# EAGLE board base (EAGLE 6.5.0)
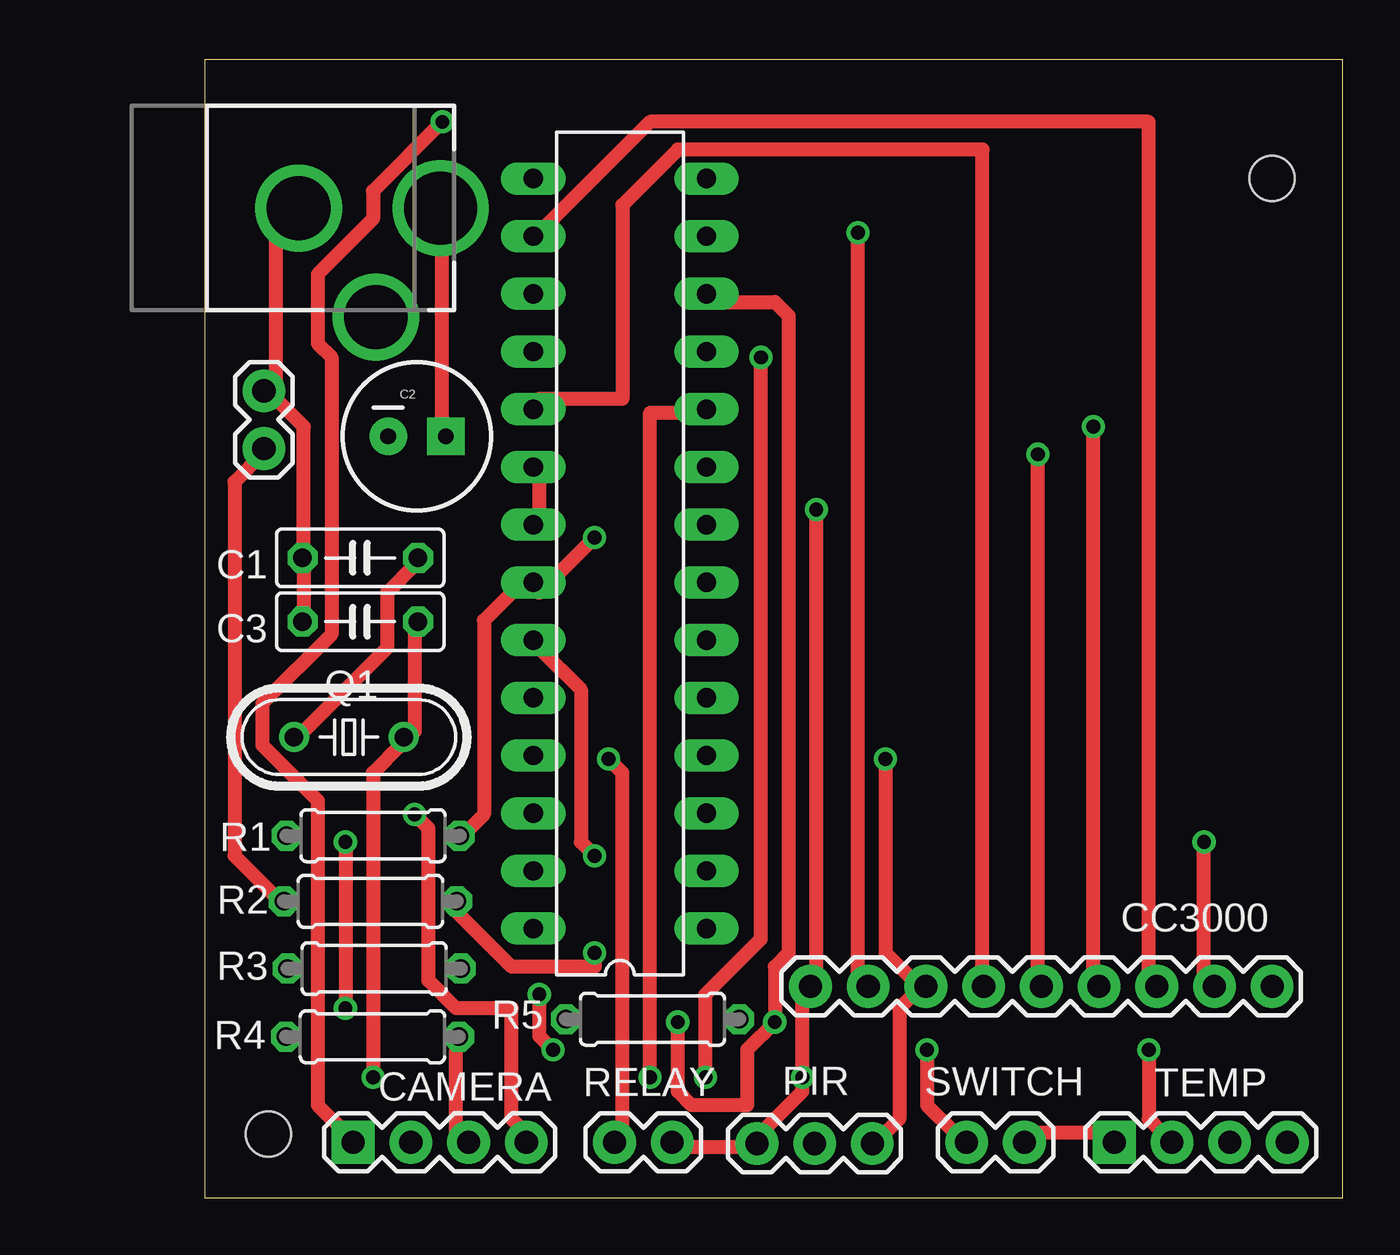
[diagram p0: board, top side]
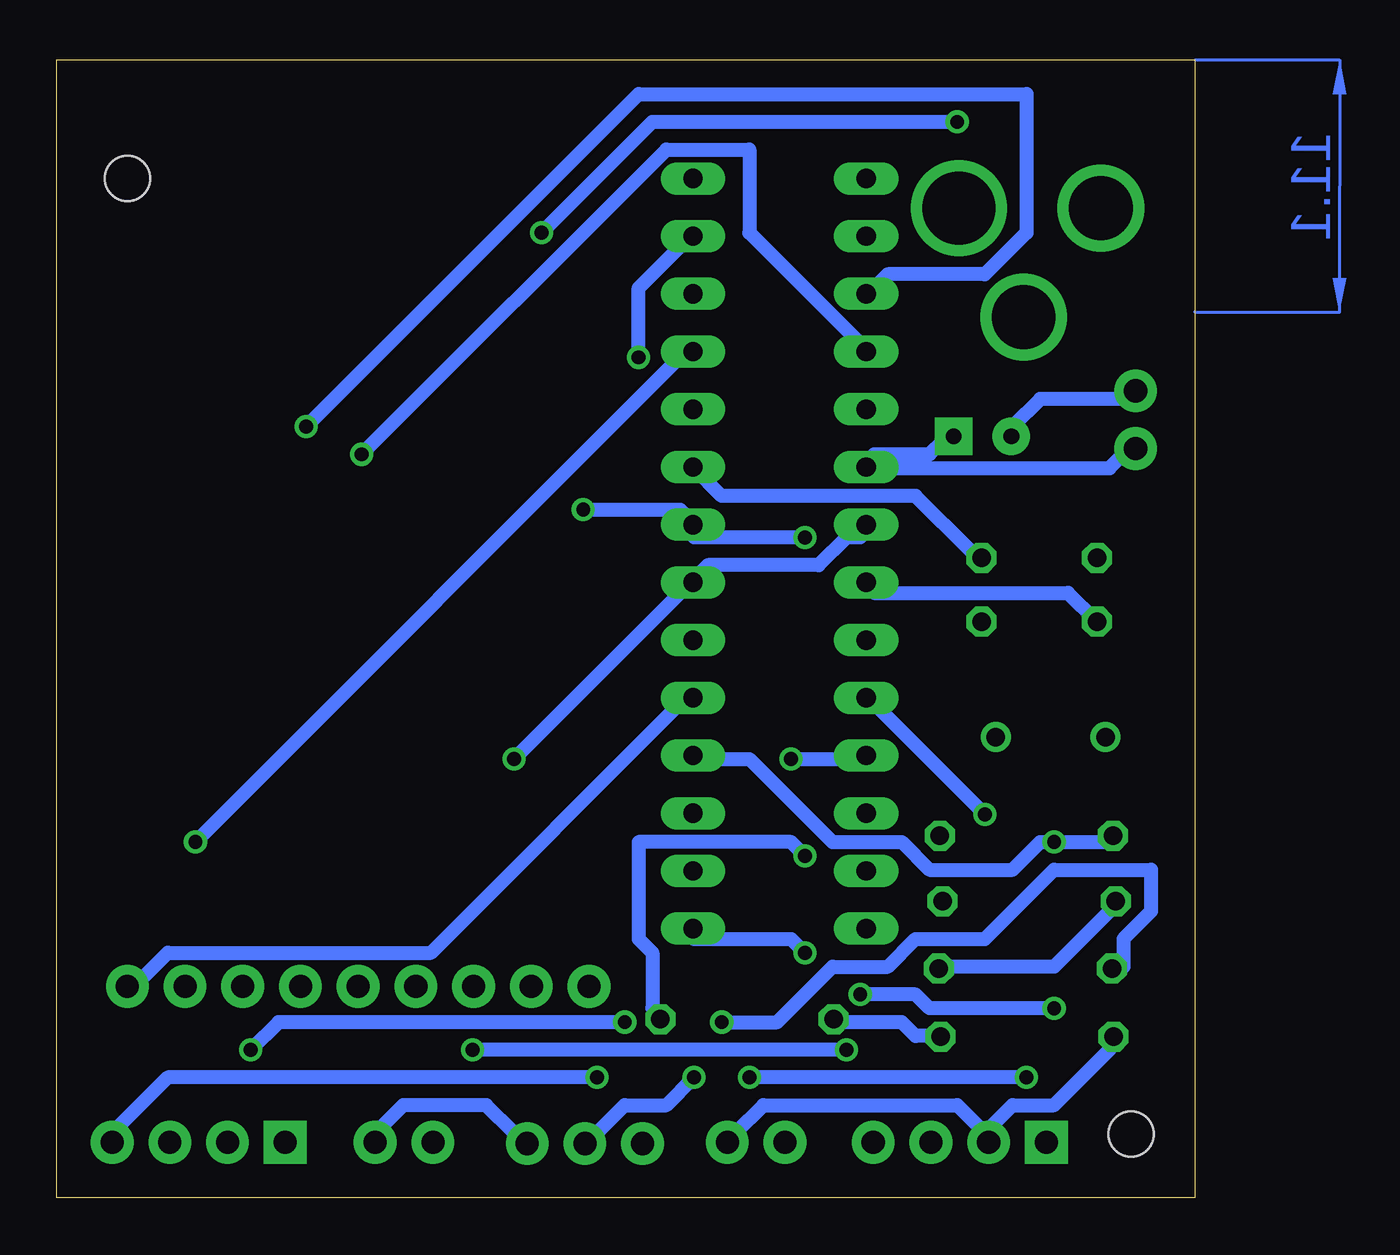
[diagram p1: board, bottom side, seen from below]

Size 50.09 x 50.09 mm. Coordinates in mm from the lower left corner, seen from the top.
Outline: 0,0 50.09,0 50.09,50.09 0,50.09 0,0
Copper layers (1*16): Top 0.035mm / dielectric 1.5mm / Bottom 0.035mm
Design rules "default *": minimum track width 24mil, minimum drill 24mil, track to track 10mil, track to pad 8mil, pad to pad 8mil, via to via 8mil, smd to smd 8mil, copper to edge 40mil, drill to drill 8mil, minimum pad ring 10mil, minimum via ring 8mil, stop-mask expansion 4mil, vias tented up to drill 0mil, thermal gap 10mil
Net classes: 0 default: width 0.152 mm, clearance 0.152 mm; 1 power: width 0.61 mm, drill 0.61 mm, clearance 0.254 mm; 2 gnd: width 0.203 mm, drill 0.559 mm, clearance 0.152 mm; 3 usbvcc: width 0.203 mm, drill 0.61 mm, clearance 0.152 mm; 4 aref: width 0.406 mm, drill 0.61 mm, clearance 0.254 mm
Holes 2 mm at 46.99,44.87 2.81,2.81

## Footprints (pad centres in the part's own frame; a part is rotated, then mirrored left to right if it is on the bottom)
C050-025X075 = drill 0.813 octagon: 1 -2.54,0; 2 2.54,0
CPOL-RADIAL-100UF-25V = drill 0.7 pad 1.651 square: 1 1.27,0 | drill 0.7 pad 1.651: 2 -1.27,0
1X04 = drill 1.016 pad 1.88 square: 1 0,0 | drill 1.016 pad 1.88: 2 2.54,0; 3 5.08,0; 4 7.62,0
1X09 = drill 1.016 pad 1.88: 1 0,0; 2 2.54,0; 3 5.08,0; 4 7.62,0; 5 10.16,0; 6 12.7,0; 7 15.24,0; 8 17.78,0; 9 20.32,0
DCJACK_2MM_PTH = drill 2.8: GND 0,7.35; GNDBREAK 4.8,10.75 | drill 3.2: PWR 0,13.6
1X02 = drill 1.016 pad 1.88: 1 0,0; 2 2.54,0
1X03 = drill 1.016 pad 1.88: 1 0,0; 2 2.54,0; 3 5.08,0
HC49/S = drill 0.813: 1 -2.413,0; 2 2.413,0
0207/7 = drill 0.813 octagon: 1 -3.81,0; 2 3.81,0
DIL28-3 = drill 0.85 pad 1.422 long: 1 -16.51,-3.81; 2 -13.97,-3.81; 3 -11.43,-3.81; 4 -8.89,-3.81; 5 -6.35,-3.81; 6 -3.81,-3.81; 7 -1.27,-3.81; 8 1.27,-3.81; 9 3.81,-3.81; 10 6.35,-3.81; 11 8.89,-3.81; 12 11.43,-3.81; 13 13.97,-3.81; 14 16.51,-3.81; 15 16.51,3.81; 16 13.97,3.81; 17 11.43,3.81; 18 8.89,3.81; 19 6.35,3.81; 20 3.81,3.81; 21 1.27,3.81; 22 -1.27,3.81; 23 -3.81,3.81; 24 -6.35,3.81; 25 -8.89,3.81; 26 -11.43,3.81; 27 -13.97,3.81; 28 -16.51,3.81

## Placement (x,y rotation side)
C1  22p  [C050-025X075]  6.85,28.17 180 top
C2  [CPOL-RADIAL-100UF-25V]  9.35,33.52 0 top
C3  22p  [C050-025X075]  6.85,25.36 180 top
CAMERA  [1X04]  6.54,2.44 0 top
CC3000  M09  [1X09]  46.99,9.31 180 top
CN1  [DCJACK_2MM_PTH]  -3.21,43.56 270 top
JP2  POWER  [1X02]  2.61,32.98 90 top
PIR  PIR  [1X03]  24.31,2.39 0 top
Q1  [HC49/S]  6.35,20.28 0 top
R1  10K  [0207/7]  7.42,15.94 0 top
R2  10K  [0207/7]  7.3,13.05 0 top
R3  10K  [0207/7]  7.46,10.09 0 top
R4  10K  [0207/7]  7.39,7.09 0 top
R5  10K  [0207/7]  19.71,7.86 0 top
RELAY  M02PTH  [1X02]  18.04,2.44 0 top
SWITCH  M02PTH  [1X02]  33.54,2.44 0 top
TEMP  [1X04]  40.04,2.44 0 top
ZU4  ATMEGA328P-PU  [DIL28-3]  18.28,28.36 90 top

## Library data of the parts
C1 C3 R1-R5 = resistor
C2 = SparkFun-Passives
CAMERA CC3000 JP2 PIR RELAY SWITCH TEMP = SparkFun-Connectors
CN1 = adafruit
Q1 = crystal; OC_FARNELL: 1667008; OC_NEWARK: unknown
ZU4 = SmartPrj

## Nets
GND [gnd]: C1.2 C2.2 C3.2 CAMERA.2 CC3000.9 CN1.GND JP2.2 PIR.1 R1.2 R4.1 RELAY.2 TEMP.4 ZU4.8 ZU4.22
GNDBREAK: CN1.GNDBREAK
N$1: CC3000.2 ZU4.11
N$2: CC3000.1 ZU4.5
N$3: R2.2 ZU4.1
N$4: C1.1 Q1.1 ZU4.9
N$5: CC3000.6 ZU4.19
N$6: CC3000.3 ZU4.16
N$7: R1.1 SWITCH.1 ZU4.4
N$8: RELAY.1 ZU4.25
N$9: R3.1 TEMP.2 ZU4.12
N$11: CAMERA.1 CC3000.8
N$12: CAMERA.4 ZU4.24
N$13: CAMERA.3 R4.2 R5.1
N$14: ZU4.6
N$15: R5.2 ZU4.23
N$19: CC3000.5 ZU4.18
N$20: CC3000.4 ZU4.17
N$26: PIR.2 ZU4.13
VCC [usbvcc]: C2.1 CC3000.7 CN1.PWR JP2.1 PIR.3 R2.1 R3.2 SWITCH.2 TEMP.1 ZU4.7 ZU4.20 ZU4.21
XTAL2: C3.1 Q1.2 ZU4.10

## Tracks (layer width: path | path; a pad name or v marks a point on that pad's centre or on a via)
GND  (via drill 0.61)
  Top 0.61: 4.37,43.7 CN1.GND 3.76,43.09 3.15,42.48 3.15,35.78 JP2.2 3.15,35.17 4.37,33.95 4.37,28.46 C1.2 4.37,27.85 4.37,25.41 C3.2 | R1.2 11.68,16.27 12.29,16.88 12.29,25.41 14.12,27.24 ZU4.22 14.73,26.63 v17.17,29.07 | RELAY.2 20.83,2.25 23.88,2.25 PIR.1 24.49,2.86 26.31,4.69 v26.31,5.3 26.31,8.95 CC3000.9 26.92,9.56 v26.92,30.29
  Bottom 0.61: C2.2 8.03,33.95 6.81,35.17 3.15,35.17 JP2.2 | v17.17,29.07 22.05,29.07 ZU4.8 22.05,29.68 22.66,30.29 v26.92,30.29 | C3.2 4.37,25.41 5.59,26.63 14.12,26.63 ZU4.22 | 9.25,2.86 8.03,4.08 6.2,4.08 3.76,6.52 R4.1 | v26.31,5.3 45.21,5.3 47.65,2.86 TEMP.4 | 9.25,2.86 10.46,4.08 19,4.08 20.22,2.86 RELAY.2 | 9.25,2.86 CAMERA.2
N$1  (via drill 0.61)
  Top 0.61: v43.99,15.66 43.99,9.56 CC3000.2
  Bottom 0.61: v43.99,15.66 22.66,37 ZU4.11
N$2
  Bottom 0.61: ZU4.5 22.66,21.76 33.63,10.78 45.21,10.78 46.43,9.56 CC3000.1
N$3  (via drill 0.61)
  Top 0.61: v17.17,10.78 17.17,10.17 13.51,10.17 11.07,12.61 R2.2
  Bottom 0.61: v17.17,10.78 17.78,11.39 22.05,11.39 ZU4.1
N$4
  Top 0.61: Q1.1 4.37,20.54 8.03,24.19 8.03,26.63 9.25,27.85 C1.1
  Bottom 0.61: ZU4.9 22.05,32.12 20.83,30.9 12.29,30.9 9.86,28.46 C1.1
N$5
  Top 0.61: ZU4.19 14.73,35.17 18.39,35.17 18.39,43.7 20.83,46.14 34.24,46.14 34.24,9.56 CC3000.6
N$6
  Top 0.61: ZU4.16 14.73,42.48 19.61,47.36 41.55,47.36 41.55,9.56 CC3000.3
N$7  (via drill 0.61)
  Top 0.61: v31.8,6.52 31.8,4.08 33.02,2.86 SWITCH.1 | v15.34,6.52 14.73,7.13 v14.73,8.95 | v6.2,15.66 v6.2,8.35
  Bottom 0.61: R1.1 3.76,15.66 v6.2,15.66 6.81,15.66 8.03,14.44 11.68,14.44 12.9,15.66 15.95,15.66 19.61,19.32 22.05,19.32 ZU4.4 | v15.34,6.52 v31.8,6.52 | v14.73,8.95 12.29,8.95 11.68,8.35 v6.2,8.35
N$8  (via drill 0.61)
  Top 0.61: v17.78,19.32 18.39,18.71 18.39,2.86 RELAY.1
  Bottom 0.61: v17.78,19.32 14.73,19.32 ZU4.25
N$9  (via drill 0.61)
  Top 0.61: v20.83,7.74 20.83,4.69 21.44,4.08 23.88,4.08 23.88,6.52 v25.09,7.74 25.09,10.17 25.7,10.78 25.7,38.83 25.09,39.43 22.66,39.43 ZU4.12 | v41.55,6.52 41.55,3.47 42.16,2.86 TEMP.2
  Bottom 0.61: v20.83,7.74 18.39,7.74 15.95,10.17 13.51,10.17 12.29,11.39 9.25,11.39 6.2,14.44 1.93,14.44 1.93,12.61 3.15,11.39 3.15,10.17 R3.1 | v41.55,6.52 40.34,7.74 v25.09,7.74
N$11  (via drill 0.61)
  Top 0.61: v10.46,47.36 7.42,44.31 7.42,43.09 4.98,40.65 4.98,37.61 5.59,37 5.59,24.8 2.54,21.76 2.54,19.93 4.98,17.49 4.98,4.08 6.2,2.86 CAMERA.1 | v28.75,42.48 28.75,9.56 CC3000.8
  Bottom 0.61: v10.46,47.36 23.88,47.36 v28.75,42.48
N$12  (via drill 0.61)
  Top 0.61: v9.25,16.88 9.86,16.27 9.86,9.56 11.07,8.35 13.51,8.35 13.51,3.47 14.12,2.86 CAMERA.4
  Bottom 0.61: v9.25,16.88 14.12,21.76 ZU4.24
N$13
  Top 0.61: R4.2 11.07,6.52 11.07,2.86 CAMERA.3
  Bottom 0.61: R5.1 15.34,7.74 12.9,7.74 12.29,7.13 11.68,7.13 R4.2
N$15  (via drill 0.61)
  Top 0.61: v17.17,15.05 16.56,15.66 16.56,22.37 14.73,24.19 ZU4.23
  Bottom 0.61: v17.17,15.05 17.78,15.66 24.49,15.66 24.49,11.39 23.88,10.78 23.88,8.35 R5.2
N$19  (via drill 0.61)
  Top 0.61: v36.68,32.73 36.68,9.56 CC3000.5
  Bottom 0.61: v36.68,32.73 23.27,46.14 19.61,46.14 19.61,42.48 14.73,37.61 ZU4.18
N$20  (via drill 0.61)
  Top 0.61: v39.12,33.95 39.12,9.56 CC3000.4
  Bottom 0.61: v39.12,33.95 24.49,48.58 7.42,48.58 7.42,42.48 9.25,40.65 13.51,40.65 14.12,40.04 ZU4.17
N$26  (via drill 0.61)
  Top 0.61: v24.49,37 24.49,11.39 22.05,8.95 v22.05,5.3
  Bottom 0.61: v24.49,37 24.49,40.04 22.66,41.87 ZU4.13 | v22.05,5.3 23.27,4.08 25.09,4.08 26.31,2.86 PIR.2
VCC  (via drill 0.61)
  Top 0.61: SWITCH.2 36.68,2.86 39.73,2.86 TEMP.1 | PIR.3 29.97,2.86 30.58,3.47 30.58,8.35 31.19,8.95 CC3000.7 31.19,9.56 29.97,10.78 v29.97,19.32 | ZU4.21 14.73,29.68 14.73,32.12 ZU4.20 | R2.1 3.15,13.22 1.32,15.05 1.32,31.51 2.54,32.73 JP2.1 | CN1.PWR 10.46,43.09 10.46,33.95 C2.1
  Bottom 0.61: SWITCH.2 36.07,2.86 34.85,4.08 31.19,4.08 29.97,2.86 PIR.3 | R3.2 11.07,10.17 6.2,10.17 3.76,12.61 R2.1 | ZU4.21 14.73,29.07 15.34,29.07 16.56,27.85 21.44,27.85 22.05,27.24 ZU4.7 22.66,26.63 v29.97,19.32 | C2.1 11.07,33.34 11.68,32.73 14.12,32.73 ZU4.20 14.12,32.12 3.76,32.12 3.15,32.73 JP2.1
XTAL2  (via drill 0.61)
  Top 0.61: C3.1 9.25,24.8 9.25,20.54 Q1.2 8.64,19.93 7.42,18.71 v7.42,5.3 | v19.61,5.3 19.61,34.56 22.05,34.56 ZU4.10
  Bottom 0.61: v7.42,5.3 v19.61,5.3
(copper drawn outside any net)
  shapes: Bottom area x1